# Altium PCB PCB1.PcbDoc
Units mm, origin at the board's own origin, x right, y up, seen from the top; angles counter-clockwise.
Board outline 104.9 x 105.16 mm, 2 copper layers (Top Layer, Bottom Layer); 47 components, 33 nets, 170 pads, 33 vias.
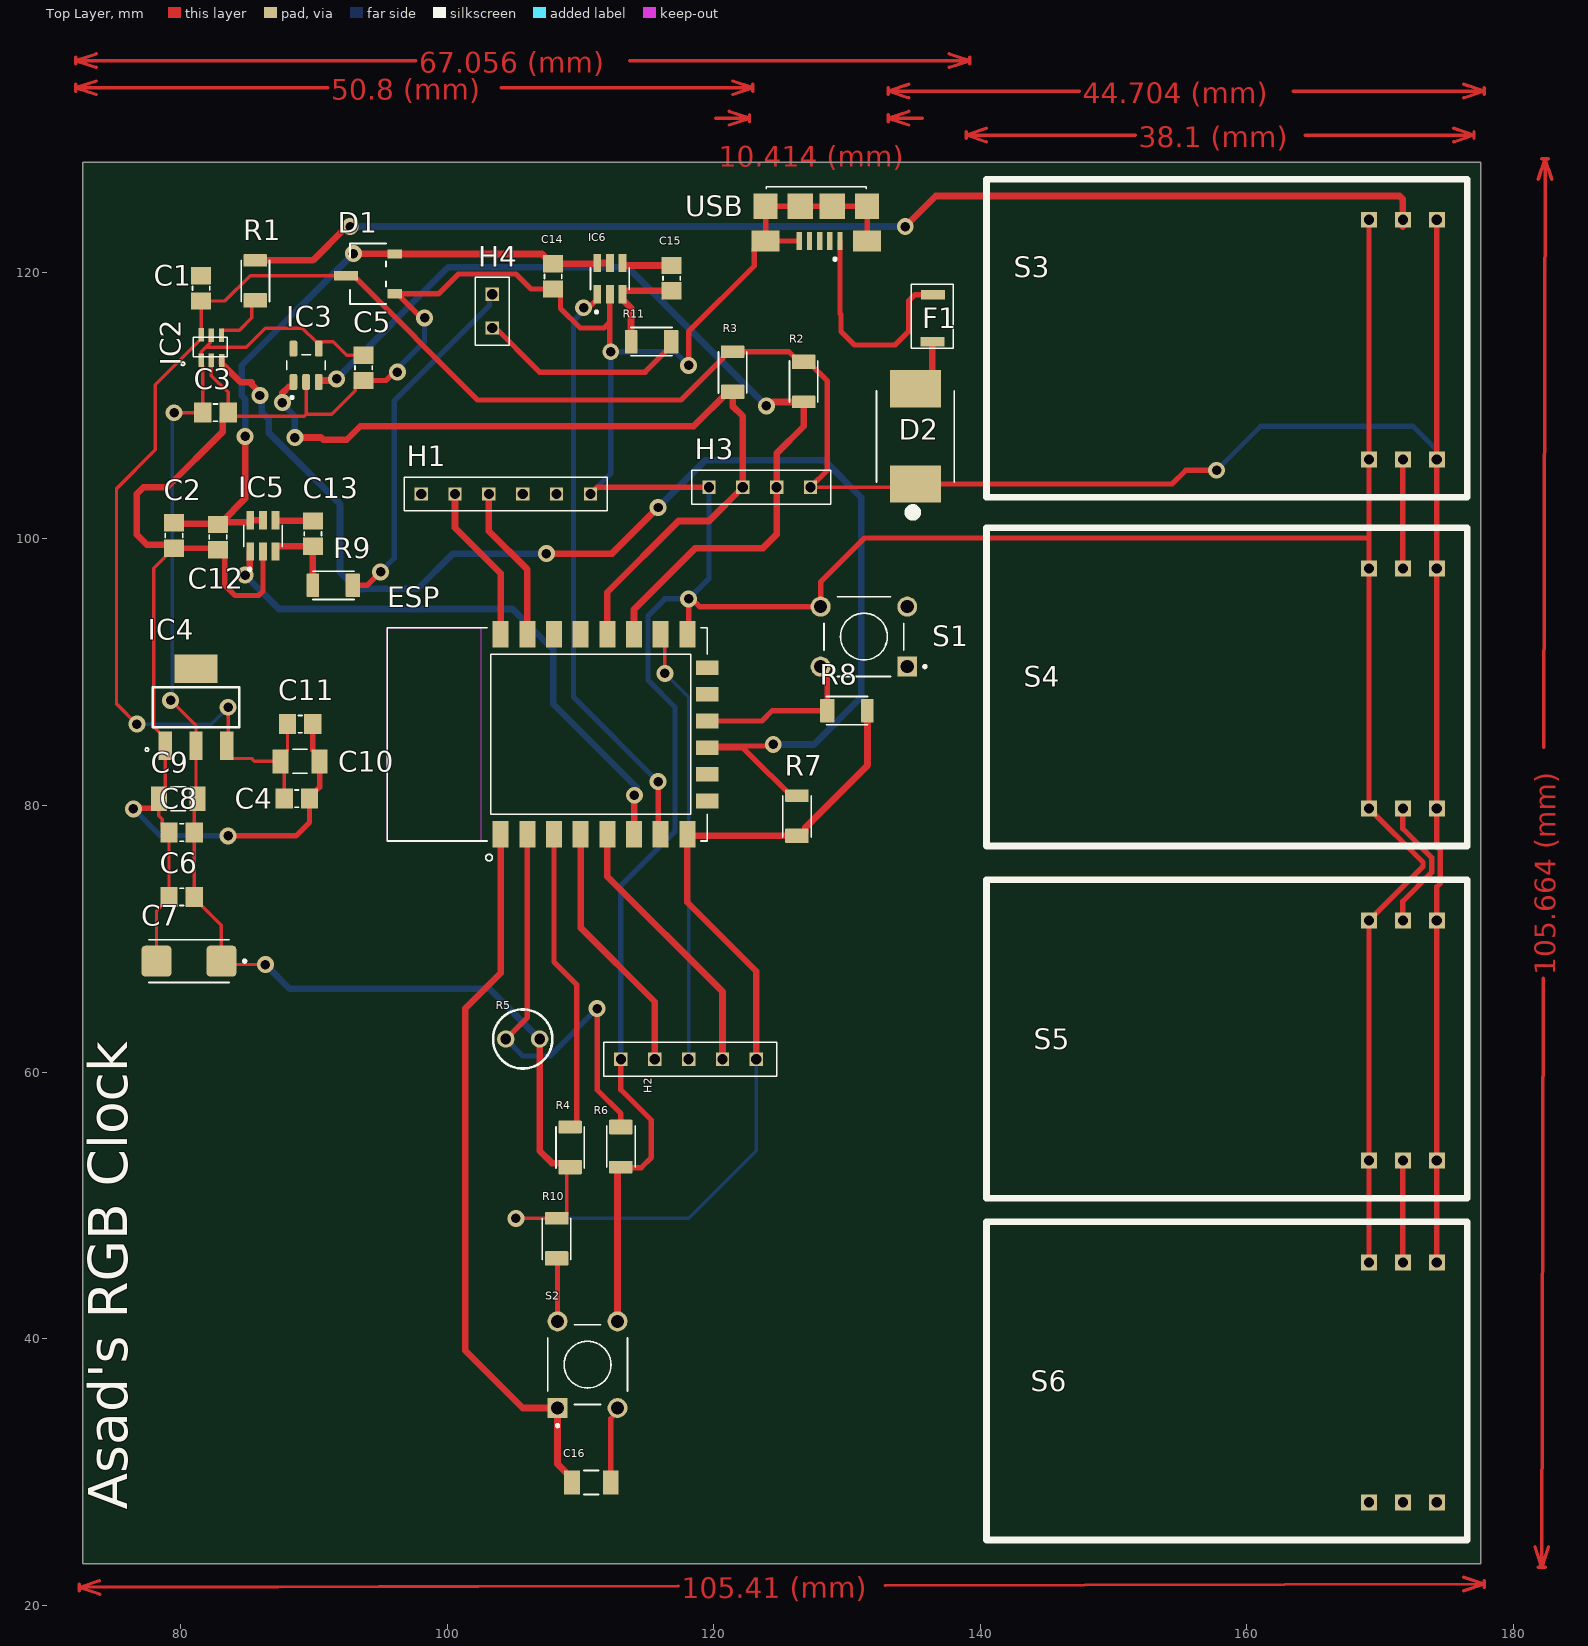
[diagram p0: Top Layer view]
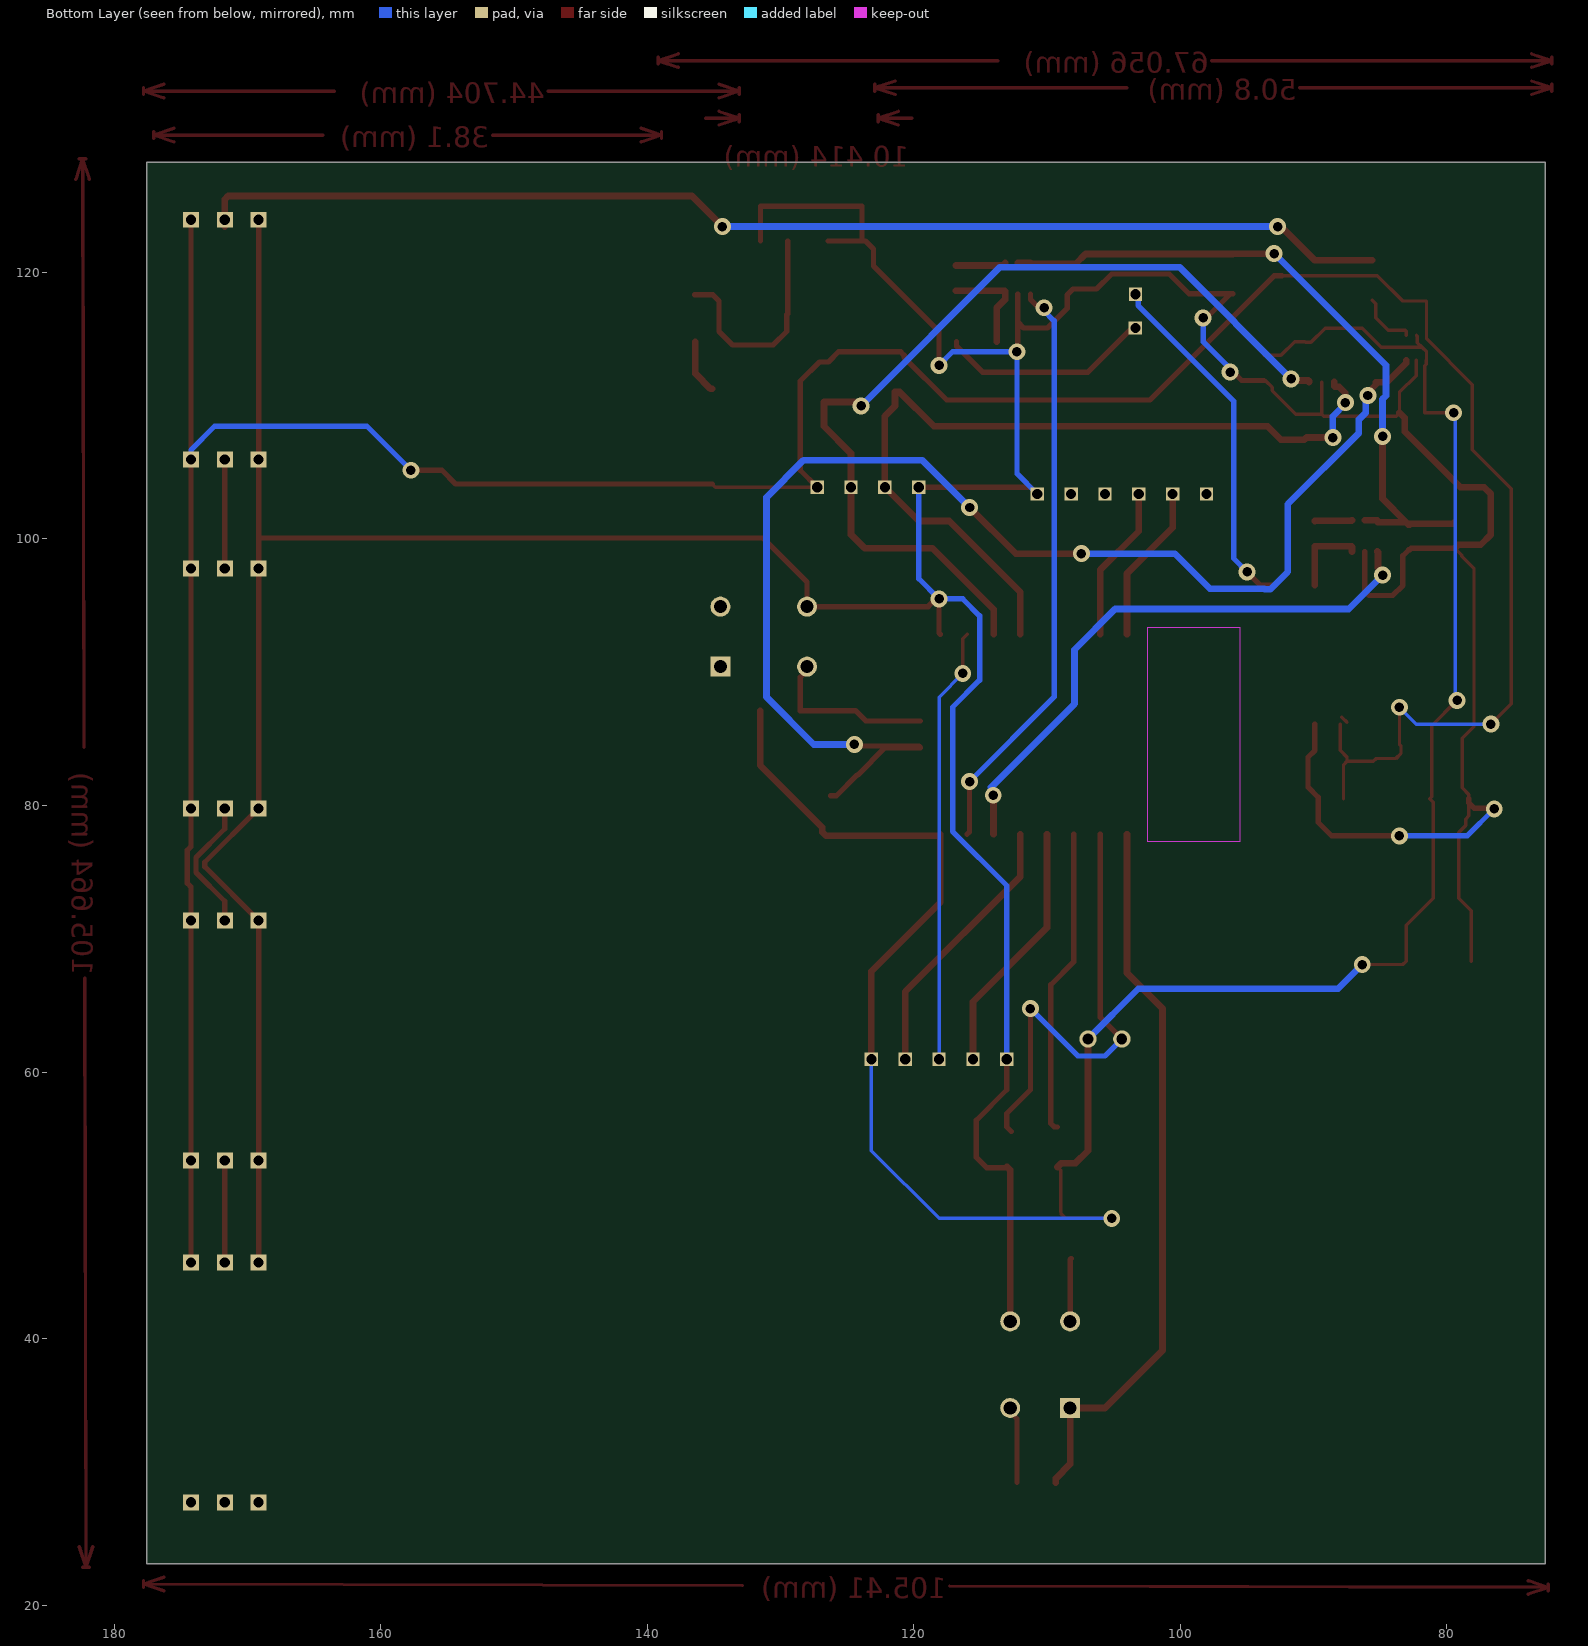
[diagram p1: Bottom Layer view, seen from below]

## Layer stack, top to bottom
Top Solder: solder mask 0.0102, Solder Resist, Dk 3.5
Top Layer: signal copper 0.0356
Dielectric 1: dielectric 0.32, FR-4, Dk 4.8
Bottom Layer: signal copper 0.0356
Bottom Solder: solder mask 0.0102, Solder Resist, Dk 3.5

## Board outline
72.644,23.114 72.644,128.27 177.546,128.27 177.546,23.114

## Design rules (kind name [scope] priority, off if disabled: settings)
Clearance [All] p1: gap=0.254 ignorepadtopadclearanceinfootprint=FALSE except(0: Arc-Hole Track-Hole SMDPad-Hole THPad-Hole Via-Hole Fill-Hole Poly-Hole Region-Hole Text-Hole)
PolygonConnect [All] p1: connectstyle=Relief reliefconductorwidth=0.254 reliefentries=4 polygonreliefangle="90 Angle" airgapwidth=0.254
RoutingVias [All] p1: holewidth=0.711 width=1.27 viastyle="Through Hole" minholewidth=0.711 minwidth=1.27 maxholewidth=0.711 maxwidth=1.27
SolderMaskExpansion [All] p1: expansion=0.102 istentingtop=FALSE
Width [All] p1: maxlimit=0.5 minlimit=0.254 preferedwidth=0.254 minimp=50.000000 maximp=50.000000 favimp=50.000000
30 further rules are at their usual default settings.

## Components (designator, comment, footprint, x,y, rotation, side; value= is the part's Value field where it differs from the comment)
C1 "100nF" "CAP 0805" 81.534,118.806 r90 top
C2 "1uF" "CAP 0603" 79.502,100.264 r270 top
C3 "100nF" "CAP 0805" 82.616,109.474 r180 top
C4 "1uF" "CAP 0603" 88.712,80.518 r0 top
C5 "100nF" "CAP 0805" 93.726,112.842 r270 top
C6 "100nF" "CAP 0805" 80.076,73.152 r180 top
C7 "100uF" "CAP 2312" 80.623,68.326 r180 top
C8 "100nF" "CAP 0805" 80.076,77.978 r0 top
C9 "10uF" "CAP 1206" 79.82,80.518 r180 top
C10 "10uF" "CAP 1206" 88.964,83.312 r0 top
C11 "100nF" "CAP 0805" 88.966,86.106 r180 top
C12 "100nF" "CAP 0805" 82.804,100.142 r270 top
C13 "10nF" "CAP 0805" 89.916,100.396 r270 top
C14 "100nF" "CAP 0805" 107.95,119.7 r270 top
C15 "10nF" "CAP 0805" 116.84,119.568 r270 top
C16 "10uF" "CAP 1206" 110.808,29.21 r0 top
D1 "MCP1700T-3302E/TT" MCP1700 94.234,119.888 r90 top
D2 "MBRS540T3G" MBRS50 135.128,107.696 r90 top
ESP "ESP8266" ESP8266 111.76,85.344 r90 top
F1 "MF-SMDF200-2" MF-SMDF200-2 165.579,496.583 r90 top
H1 "6 PIN H" "6 PIN H" 104.394,103.379 r270 top
H2 "5 PIN H" "5 PIN H" 118.11,60.959 r90 top
H3 "4 PIN H" "4 PIN H" 123.444,103.885 r90 top
H4 "2 PIN H" "2 PIN H" 103.887,109.22 r0 top
IC2 "74LVC1T45GW,125" 74LVC1T45GW,125 83.847,116.322 r90 top
IC3 "24LC64T-I/OT" 24LC64T-I/OT 89.408,113.03 r90 top
IC4 "LD1117S33TR" LD1117S33TR 82.296,88.138 r90 top
IC5 "AT42QT1010-TSHR" AT42QT1010-TSHR 86.172,100.23 r90 top
IC6 "AT42QT1010-TSHR" AT42QT1010-TSHR 112.202,119.534 r90 top
R1 "RES 1K" "RES 1206" 85.598,119.401 r90 top
R2 "10K" "RES 1206" 126.746,111.782 r270 top
R3 "10K" "RES 1206" 121.412,112.543 r90 top
R4 "10K" "RES 1206" 109.22,54.377 r90 top
R5 "NSL 19M51." NSL-19M51 105.664,62.484 r90 top
R6 "10K" "RES 1206" 113.03,54.378 r270 top
R7 "10K" "RES 1206" 126.238,79.226 r90 top
R8 "10K" "RES 1206" 130.026,87.122 r0 top
R9 "10K" "RES 1206" 91.419,96.52 r180 top
R10 "10K" "RES 1206" 108.204,47.519 r90 top
R11 "10K" "RES 1206" 115.295,114.808 r180 top
S1 "PUSH BUTTON" "PUSH BUTTON" 131.266,92.674 r180 top
S2 "PUSH BUTTON" "PUSH BUTTON" 110.526,38.048 r90 top
S3 "7 SEGMENT" "7 SEGMENT" 174.244,123.952 r270 top
S4 "7 SEGMENT" "7 SEGMENT" 174.244,97.79 r270 top
S5 "7 SEGMENT" "7 SEGMENT" 174.244,71.374 r270 top
S6 "7 SEGMENT" "7 SEGMENT" 174.244,45.72 r270 top
USB "10118192-0002LF" 10118192-0002LF 127.692,123.63 r180 top

## Footprints (in the part's own frame and the unit in brackets; to place one, negate y for a bottom-side part, rotate by r counter-clockwise, add the part's x,y. Pads: shape width x height; smd on the part's side, far side on the other; paste and mask are expansions set on the pad)
"2 PIN H" [mil]
  rect 39.37x39.37 hole 30: 1(-20.06,360) 2(-20,260)
  silkscreen extent -70,210 30,410
"4 PIN H" [mm]
  rect 1x1 hole 0.762: 1(-0.001,3.81) 2(0.001,1.27) 3(0.001,-1.27) 4(0.001,-3.81)
  silkscreen extent -1.27,-5.33 1.27,5.08
"5 PIN H" [mm]
  rect 1x1 hole 0.762: 1(-0.001,5.08) 2(0.001,2.54) 3(0.001,0) 4(0.001,-2.54) 5(0.001,-5.08)
  silkscreen extent -1.27,-6.6 1.27,6.35
"6 PIN H" [mm]
  rect 1x1 hole 0.762: 1(-0.001,6.35) 2(0.001,3.81) 3(0.001,1.27) 4(0.001,-1.27) 5(0.001,-3.81) 6(0.001,-6.35)
  silkscreen extent -1.27,-7.62 1.27,7.62
"7 SEGMENT" [mm]
  rect 1.2x1.2 hole 0.762: 1(0,0) 2(0,-2.54) 3(0,-5.08) 4(18,0) 5(18,-2.54) 6(18,-5.08)
  silkscreen extent -3.05,-33.78 20.83,2.29
24LC64T-I/OT [mm]
  rrect50% 1.21x0.59 smd: 1(-1.255,0.95) 2(-1.255,0) 3(-1.255,-0.95) 4(1.255,-0.95) 5(1.255,0.95)
  silkscreen extent -2.51,-1.45 0.8,1.45
74LVC1T45GW,125 [mm]
  rect 1x0.4 smd: 1(-2.9,2.3) 2(-2.922,1.542) 3(-2.934,0.777) 4(-1.041,0.79) 5(-1.028,1.555) 6(-1.006,2.313)
  silkscreen extent -3.3,0.34 -1.18,3.81
10118192-0002LF [mm]
  rect 0.4x1.35 smd: 1(-1.778,1.27) 2(-1.016,1.27) 3(-0.254,1.27) 4(0.508,1.27) 5(1.27,1.27)
  rect 2.1x1.6 smd: S1(-3.81,1.27) S2(3.81,1.27)
  rect 1.8x1.9 smd: S3(-3.8,-1.338) S6(3.8,-1.338)
  rect 1.9x1.9 smd: S4(-1.2,-1.338) S5(1.2,-1.338)
  silkscreen extent -3.75,-2.79 3.75,2.74
AT42QT1010-TSHR [mm]
  rect 1.37x0.59 smd: 1(-1.17,0.95) 2(-1.17,0) 3(-1.17,-0.95) 4(1.17,-0.95) 5(1.17,0) 6(1.17,0.95)
  silkscreen extent -2.6,-1.45 0.81,1.45
"CAP 0603" [mm]
  rect 1.3x1.5 smd: 1(-0.95,0) 2(0.95,0)
  silkscreen extent -0.15,-0.65 0.15,0.65
"CAP 0805" [mm]
  rect 1.3x1.5 smd: 1(-0.95,0) 2(0.95,0)
  silkscreen extent -0.15,-0.65 0.15,0.65
"CAP 1206" [mm]
  rect 1.2x1.82 smd: 1(-1.46,0) 2(1.46,0)
  silkscreen extent -0.54,-0.9 0.54,0.9
"CAP 2312" [mm]
  rrect25% 2.24x2.32 smd: 1(-2.435,0) 2(2.435,0)
  silkscreen extent -4.28,-1.6 3,1.6
ESP8266 [mm]
  rect 2x1.2 smd: 1(-7.5,7.75) 2(-7.5,5.75) 3(-7.5,3.75) 4(-7.5,1.75) 5(-7.5,-0.25) 6(-7.5,-2.25) 7(-7.5,-4.25) 8(-7.5,-6.25) 15(7.5,-6.25) 16(7.5,-4.25) 17(7.5,-2.25) 18(7.5,-0.25) 19(7.5,1.75) 20(7.5,3.75) 21(7.5,5.75) 22(7.5,7.75)
  rect 1.1x1.7 smd: 9(-5,-7.75) 10(-3,-7.75) 11(-1,-7.75) 12(1,-7.75) 13(3,-7.75) 14(5,-7.75)
  Keep-Out Layer region: 8,9.26 -8.009,9.26 -8.009,16.25 8,16.25
  Keep-Out Layer region: 8,9.26 -8.009,9.26 -8.009,16.25 8,16.25
  silkscreen extent -9.5,-7.75 8,16.25
LD1117S33TR [mm]
  rect 2.15x1 smd: 1(-3.662,3.443) 2(-3.662,1.143) 3(-3.662,-1.157)
  rect 2.15x3.25 smd: 4(2.138,1.143)
  silkscreen extent -4.06,-2.11 0.74,4.95
MBRS50 [mil]
  rect 110x150 smd: A(140.49,0) C(-140.49,0)
  silkscreen extent -237,-115 135,115
MCP1700 [mm]
  rect 0.7x1.1 smd: 1(-1.5,-1.827) 2(1.5,-1.827)
  rect 0.7x1.8 smd paste-2 mask+0: 3(-0.127,1.827)
  silkscreen extent -2.27,-1.19 2.27,1.53
MF-SMDF200-2 [mm]
  rect 0.7x1.8 smd paste-2 mask+0: 1(-381.775,29.181) 2(-378.246,29.14)
  silkscreen extent -382.28,27.6 -377.48,30.75
NSL-19M51 [mm]
  round 1.308 hole 0.8: 1(0,1.27) 2(0,-1.27)
  silkscreen extent -2.22,-2.22 2.22,2.22
"PUSH BUTTON" [mm]
  rect 1.498x1.498 hole 0.99: 1(-3.25,2.25)
  round 1.498 hole 0.99: 2(3.25,2.25) 3(-3.25,-2.25) 4(3.25,-2.25)
  silkscreen extent -4.67,-3 3,3
"RES 1206" [mm]
  rrect14% 1.09x1.77 smd: 1(-1.502,0)
  rrect14% 0.94x1.77 smd: 2(1.503,0)
  silkscreen extent -1.59,-1.06 1.51,1.06

## Part data
C1 C3 C5 C6 C8 C11 C12 C14: library part "CAP 100nF"
C2 C4: library part "CAP 1 uF 50V", "SAMSUNG ELECTRO-MECHANICS - CL21B105KBFNNNG - MLCC CAPACITORS", Case Code (Imperial)=0805, Case Code (Metric)=2012, Dielectric=X7R, Manufacturer=Samsung, Manufacturer Part Number=CL21B105KBFNNNG, Max Operating Temperature=125°C, Min Operating Temperature=-55°C, Package Quantity=3000, Supplier Part Number 1=1276-6470-1-ND, Tolerance=10%, Voltage=50V, Capacitance=1uF, Case/Package=0805, Category="Ceramic Capacitors", ComponentLink1Description=https://datasheet.ciiva.com/25733/cl21b105kbfnnng-25733278.pdf?src-supplier=Digi-Key, ComponentLink1URL=https://datasheet.ciiva.com/25733/cl21b105kbfnnng-25733278.pdf?src-supplier=Digi-Key, ComponentLink2Description=https://datasheet.ciiva.com/29199/455898-da-01-en-vs-kondensator-0805-29199201.pdf?src-supplier=Conrad, ComponentLink2URL=https://datasheet.ciiva.com/29199/455898-da-01-en-vs-kondensator-0805-29199201.pdf?src-supplier=Conrad, ComponentLink3Description=https://datasheet.ciiva.com/26310/mlcc-catalogdownload2013-eng-26310125.pdf?src-supplier=Distrelec, ComponentLink3URL=https://datasheet.ciiva.com/26310/mlcc-catalogdownload2013-eng-26310125.pdf?src-supplier=Distrelec, ComponentLink4Description=https://datasheet.ciiva.com/16428/cl05b104kq5nnnc-16428872.pdf?src-supplier=Future+Electronics, ComponentLink4URL=https://datasheet.ciiva.com/16428/cl05b104kq5nnnc-16428872.pdf?src-supplier=Future+Electronics, Construction=Flat, Contact Plating=Tin, Depth=1.25mm, Length=2mm, Material=Ceramic, Mount="Surface Mount", Packaging="Tape and Reel", Pricing 1="1=0.12000, 10=0.08900, 50=0.05020, 100=0.04160, 500=0.02918, 1000=0.02416 (USD)", RoHS=Yes, RoHS Compliant=Yes, Series=CL, Stock 1=1584886, Supplier 1=Digi-Key, Termination=Wraparound, Thickness=0.053inch, Voltage Rating=50V, Width=0.049inch
C7: library part "CAP 100uF 16V", "Cap Tant Solid 100uf 16V C Case (6.0x3.2x2.5mm) 10% SMD 200 mOhm 125C T/R", Case Code (Imperial)=2413, Case Code (Metric)=6032, ESR (Equivalent Series Resistance)=200mR, Manufacturer=KEMET, Manufacturer Part Number=T495C107K016ATE200, Max Operating Temperature=125°C, Min Operating Temperature=-55°C, Package Quantity=1, Supplier Part Number 1=399-11392-1-ND, Tolerance=10%, Voltage Rating=16V, Capacitance=100uF, Case/Package=2413, Category="Tantalum Capacitors", ComponentLink1Description=http://www.farnell.com/datasheets/2373561.pdf?src-supplier=Farnell, ComponentLink1URL=http://www.farnell.com/datasheets/2373561.pdf?src-supplier=Farnell, ComponentLink2Description=http://www.farnell.com/datasheets/2758439.pdf?src-supplier=Newark, ComponentLink2URL=http://www.farnell.com/datasheets/2758439.pdf?src-supplier=Newark, ComponentLink3Description=http://www.farnell.com/datasheets/2015701.pdf?src-supplier=Element14, ComponentLink3URL=http://www.farnell.com/datasheets/2015701.pdf?src-supplier=Element14, ComponentLink4Description=http://www.farnell.com/datasheets/2373561.pdf?src-supplier=Newark, ComponentLink4URL=http://www.farnell.com/datasheets/2373561.pdf?src-supplier=Newark, ComponentLink5Description=https://api.kemet.com/component-edge/download/datasheet/T495C107K016ATE200.pdf?src-supplier=Digi-Key, ComponentLink5URL=https://api.kemet.com/component-edge/download/datasheet/T495C107K016ATE200.pdf?src-supplier=Digi-Key, ComponentLink6Description=http://capacitoredge.kemet.com/capedge2/DataSheet/Datasheet-T495C107K016ATE200.pdf?pn=T495C107K016ATE200&src-supplier=Avnet, ComponentLink6URL=http://capacitoredge.kemet.com/capedge2/DataSheet/Datasheet-T495C107K016ATE200.pdf?pn=T495C107K016ATE200&src-supplier=Avnet, Depth=3.2mm, Features="General Purpose", Height=2.5mm, Height - Seated (Max)=0.11inch, Lead Free="Lead Free", Length=0.236inch, Life (Hours)=2000Hour, Mount="Surface Mount", Packaging="Cut Tape", Pricing 1="1=1.73000, 10=1.36900, 50=1.18600, 100=1.02640 (USD)", Radiation Hardening=No, REACH SVHC=Unknown, RoHS=Yes, RoHS Compliant=Yes, Stock 1=4587, Supplier 1=Digi-Key, Voltage Rating (DC)=16V, Width=0.126inch
C9 C10 C16: library part "CAP 10uF 10V", "Cap Ceramic 10uF 10V X5R 10% SMD 1206 85C T/R", Case Code (Imperial)=1206, Case Code (Metric)=3216, Dielectric=X5R, Manufacturer=Samsung, Manufacturer Part Number=CL31A106KPHNNNE, Max Operating Temperature=85°C, Min Operating Temperature=-55°C, Supplier Part Number 1=1276-1148-1-ND, Tolerance=10%, Voltage Rating=10V, Capacitance=10uF, Case/Package=1206, Category="Ceramic Capacitors", ComponentLink1Description=https://datasheet.ciiva.com/15195/getdatasheetpartid-357468-15195994.pdf?src-supplier=Verical, ComponentLink1URL=https://datasheet.ciiva.com/15195/getdatasheetpartid-357468-15195994.pdf?src-supplier=Verical, ComponentLink2Description=https://datasheet.ciiva.com/16224/cl31a106kphnnne-16224988.pdf?src-supplier=Future+Electronics, ComponentLink2URL=https://datasheet.ciiva.com/16224/cl31a106kphnnne-16224988.pdf?src-supplier=Future+Electronics, Construction=Flat, Contact Plating=Tin, Depth=1.6mm, Height=1.6mm, Length=3.2mm, Mount="Surface Mount", Packaging="Tape and Reel", Pricing 1="1=0.23000, 10=0.15900, 50=0.09540, 100=0.08060, 500=0.05516, 1000=0.04880 (USD)", Radiation Hardening=No, RoHS=Yes, RoHS Compliant=Yes, Series=CL, Stock 1=176788, Supplier 1=Digi-Key, Thickness=0.071inch, Width=0.063inch
C13 C15: library part "CAP 10nF 50V", "SAMSUNG ELECTRO-MECHANICS - CL21B103KBANNNC - SMD Vícevrstvý Keramický Kondenzátor, 10000 pF, 50 V, 0805 [2012 Metrické], ± 10%, X7R, CL Series", Case Code (Imperial)=0805, Case Code (Metric)=2012, Dielectric=X7R, Manufacturer=Samsung, Manufacturer Part Number=CL21B103KBANNNC, Max Operating Temperature=125°C, Min Operating Temperature=-55°C, Supplier Part Number 1=1276-1015-1-ND, Tolerance=10%, Voltage=50V, Capacitance=10nF, Case/Package=0805, Category="Ceramic Capacitors", ComponentLink1Description=https://datasheet.ciiva.com/25709/cl21b103kbannnc-25709781.pdf?src-supplier=Digi-Key, ComponentLink1URL=https://datasheet.ciiva.com/25709/cl21b103kbannnc-25709781.pdf?src-supplier=Digi-Key, ComponentLink2Description=https://datasheet.ciiva.com/29199/455082-da-01-en-vs-kondensator-0805-29199459.pdf?src-supplier=Conrad, ComponentLink2URL=https://datasheet.ciiva.com/29199/455082-da-01-en-vs-kondensator-0805-29199459.pdf?src-supplier=Conrad, Construction=Flat, Contact Plating=Tin, Depth=1.25mm, Height=0.65mm, Lead Free="Lead Free", Length=2mm, Material=Ceramic, Mount="Surface Mount", Packaging="Tape and Reel", Pricing 1="1=0.10000, 10=0.04700, 50=0.02560, 100=0.02100, 500=0.01498, 1000=0.01176 (USD)", Radiation Hardening=No, RoHS=Yes, RoHS Compliant=Yes, Series=CL, Stock 1=930321, Supplier 1=Digi-Key, Thickness=0.03inch, Voltage Rating=50V, Voltage Rating (DC)=50V, Width=0.049inch
D1: "Pwr Sply Func; Voltage Regulator; LDO; SOT-23; PD 369.6mW; VO 3.3V; Regline +/-0.75%/V", Case/Package=SOT-23, Dropout Voltage=178mV, Input Bias Current=1.6uA, Manufacturer=Microchip, Max Input Voltage=6V, Max Operating Temperature=125°C, Max Output Current=250mA, Max Output Voltage=3.3V, Max Power Dissipation=369.6mW, Min Input Voltage=2.3V, Min Operating Temperature=-40°C, Nominal Supply Current=4uA, Output Voltage Accuracy=2%, Package Quantity=3000, Supplier Part Number 1=6989044P, Accuracy=2%, Category="Voltage Regulators - Linear", ComponentLink1Description=https://datasheet.ciiva.com/2040/21826b-2040112.pdf?src-supplier=Digi-Key, ComponentLink1URL=https://datasheet.ciiva.com/2040/21826b-2040112.pdf?src-supplier=Digi-Key, ComponentLink2Description=https://datasheet.ciiva.com/5801/1784514-5801824.pdf?src-supplier=Farnell, ComponentLink2URL=https://datasheet.ciiva.com/5801/1784514-5801824.pdf?src-supplier=Farnell, ComponentLink3Description=https://datasheet.ciiva.com/2040/21826b-2040113.pdf?src-supplier=Digi-Key, ComponentLink3URL=https://datasheet.ciiva.com/2040/21826b-2040113.pdf?src-supplier=Digi-Key, ComponentLink4Description=https://datasheet.ciiva.com/2040/21826b-2040114.pdf?src-supplier=Digi-Key, ComponentLink4URL=https://datasheet.ciiva.com/2040/21826b-2040114.pdf?src-supplier=Digi-Key, ComponentLink5Description=https://datasheet.ciiva.com/3224/jp011779-3224133.pdf?src-supplier=Avnet, ComponentLink5URL=https://datasheet.ciiva.com/3224/jp011779-3224133.pdf?src-supplier=Avnet, ComponentLink6Description=https://datasheet.ciiva.com/7649/1784514-7649813.pdf?src-supplier=Element14, ComponentLink6URL=https://datasheet.ciiva.com/7649/1784514-7649813.pdf?src-supplier=Element14, ComponentLink7Description=https://datasheet.ciiva.com/15200/getdatasheetpartid-453599-15200229.pdf?src-supplier=Verical, ComponentLink7URL=https://datasheet.ciiva.com/15200/getdatasheetpartid-453599-15200229.pdf?src-supplier=Verical, ComponentLink8Description=https://datasheet.ciiva.com/17364/jp011779-17364263.pdf?src-supplier=Avnet+Europe, ComponentLink8URL=https://datasheet.ciiva.com/17364/jp011779-17364263.pdf?src-supplier=Avnet+Europe, ComponentLink9Description=https://datasheet.ciiva.com/14150/mcp1700-eng-tds-14150122.pdf?src-supplier=Distrelec, ComponentLink9URL=https://datasheet.ciiva.com/14150/mcp1700-eng-tds-14150122.pdf?src-supplier=Distrelec, ComponentLink10Description=https://datasheet.ciiva.com/22710/1784514-22710988.pdf?src-supplier=Element14, ComponentLink10URL=https://datasheet.ciiva.com/22710/1784514-22710988.pdf?src-supplier=Element14, ComponentLink11Description=https://datasheet.ciiva.com/29305/651414-da-01-en-ic-reg-ld-mcp1700t-3302e-tt-sot-23-3-mcp-29305258.pdf?src-supplier=Conrad, ComponentLink11URL=https://datasheet.ciiva.com/29305/651414-da-01-en-ic-reg-ld-mcp1700t-3302e-tt-sot-23-3-mcp-29305258.pdf?src-supplier=Conrad, Contact Plating=Tin,Matte, Height=0.95mm, Lead Free="Lead Free", Length=2.9mm, Manufacturer Part Number=MCP1700T-3302E/TT, Max Supply Voltage=6V, Min Output Voltage=3.3V, Min Supply Voltage=2.3V, Mount="Surface Mount", Nominal Output Voltage=3.3V, Number of Outputs=1, Number of Pins=3, Output Current=250mA, Output Type=Fixed, Output Voltage=3.3V, Packaging="Tape and Reel", Polarity=Positive, Power Dissipation=369.6mW, Pricing 1="1=0.40600 (USD)", Quiescent Current=4uA, Radiation Hardening=No, REACH SVHC="No SVHC", RoHS=Yes, Stock 1=1170, Supplier 1=RSComponents, Termination=SMD/SMT, Width=1.3mm
D2: "ON SEMICONDUCTOR - MBRS540T3G - Schottky Rectifier, 40 V, 5 A, Single, DO-214AB (SMC), 2 Pins, 500 mV", Average Rectified Current=5A, Case/Package=SMC, Forward Voltage=500mV, Manufacturer="ON Semiconductor", Max Forward Surge Current (Ifsm)=190A, Max Operating Temperature=150°C, Max Repetitive Reverse Voltage (Vrrm)=40V, Max Reverse Current=300uA, Min Operating Temperature=-65°C, Package Quantity=2500, Supplier Part Number 1=94T5861, Category="Rectifier Diodes", ComponentLink1Description=https://datasheet.ciiva.com/916/mbrs540t3-d-916082.pdf?src-supplier=Digi-Key, ComponentLink1URL=https://datasheet.ciiva.com/916/mbrs540t3-d-916082.pdf?src-supplier=Digi-Key, ComponentLink2Description=https://datasheet.ciiva.com/16225/mbrs540t3-d-16225604.pdf?src-supplier=Future+Electronics, ComponentLink2URL=https://datasheet.ciiva.com/16225/mbrs540t3-d-16225604.pdf?src-supplier=Future+Electronics, ComponentLink3Description=https://datasheet.ciiva.com/22659/1708285-22659081.pdf?src-supplier=Element14, ComponentLink3URL=https://datasheet.ciiva.com/22659/1708285-22659081.pdf?src-supplier=Element14, ComponentLink4Description=https://datasheet.ciiva.com/916/mbrs540t3-d-916083.pdf?src-supplier=Digi-Key, ComponentLink4URL=https://datasheet.ciiva.com/916/mbrs540t3-d-916083.pdf?src-supplier=Digi-Key, ComponentLink5Description=https://datasheet.ciiva.com/916/mbrs540t3-d-916084.pdf?src-supplier=Digi-Key, ComponentLink5URL=https://datasheet.ciiva.com/916/mbrs540t3-d-916084.pdf?src-supplier=Digi-Key, ComponentLink6Description=https://datasheet.ciiva.com/5763/mbrs540t3-d-5763253.pdf?src-supplier=Farnell, ComponentLink6URL=https://datasheet.ciiva.com/5763/mbrs540t3-d-5763253.pdf?src-supplier=Farnell, ComponentLink7Description=https://datasheet.ciiva.com/29883/mbrs540t3-d-29883735.pdf?src-supplier=Avnet, ComponentLink7URL=https://datasheet.ciiva.com/29883/mbrs540t3-d-29883735.pdf?src-supplier=Avnet, ComponentLink8Description=https://datasheet.ciiva.com/8299/mbrs540t3-d-8299865.pdf?src-supplier=Avnet, ComponentLink8URL=https://datasheet.ciiva.com/8299/mbrs540t3-d-8299865.pdf?src-supplier=Avnet, ComponentLink9Description=https://datasheet.ciiva.com/25948/mbrs540t3-d-25948171.pdf?src-supplier=Avnet+Europe, ComponentLink9URL=https://datasheet.ciiva.com/25948/mbrs540t3-d-25948171.pdf?src-supplier=Avnet+Europe, ComponentLink10Description=https://datasheet.ciiva.com/15144/getdatasheetpartid-40347-15144093.pdf?src-supplier=Verical, ComponentLink10URL=https://datasheet.ciiva.com/15144/getdatasheetpartid-40347-15144093.pdf?src-supplier=Verical, Contact Plating=Tin,Matte, Current Rating=5A, Element Configuration=Single, Forward Current=5A, Halogen Free="Halogen Free", Height=0.095inch, Lead Free="Lead Free", Length=0.279inch, Manufacturer Part Number=MBRS540T3G, Max Reverse Leakage Current=300uA, Max Reverse Voltage (DC)=40V, Max Surge Current=190A, Number of Pins=2, Output Current=5A, Packaging="Tape and Reel", Peak Non-Repetitive Surge Current=190A, Polarity=Standard, Pricing 1="5=0.51800, 10=0.44800, 100=0.31900, 500=0.25500 (USD)", Radiation Hardening=No, REACH SVHC="No SVHC", RoHS=Yes, RoHS Compliant=Yes, Series=-, Stock 1=89, Supplier 1=Newark, Voltage Rating (DC)=40V, Width=0.24inch
F1: "BOURNS         MF-SMDF200-2             FUSE, RESETTABLE PTC, 10V, 2A, SMD", Case Code (Imperial)=2018, Case Code (Metric)=5045, Current Rating=40A, Hold Current=2A, Manufacturer=Bourns, Max Operating Temperature=85°C, Min Operating Temperature=-40°C, Operating Supply Voltage=10V, Package Quantity=6000, Power Dissipation=1.1W, Resistance=100mR, Supplier Part Number 1=MF-SMDF200-2CT-ND, Trip Current=4A, Approvals=UL,CSA,TUV, Case/Package=2018, Category="PTC Resettable Fuses", ComponentLink1Description=https://datasheet.ciiva.com/327/mfsmdf2-327988.pdf?src-supplier=Digi-Key, ComponentLink1URL=https://datasheet.ciiva.com/327/mfsmdf2-327988.pdf?src-supplier=Digi-Key, ComponentLink2Description=https://datasheet.ciiva.com/3020/mfsmdf2-3020610.pdf?src-supplier=Avnet, ComponentLink2URL=https://datasheet.ciiva.com/3020/mfsmdf2-3020610.pdf?src-supplier=Avnet, ComponentLink3Description=https://datasheet.ciiva.com/327/mfsmdf2-327989.pdf?src-supplier=Digi-Key, ComponentLink3URL=https://datasheet.ciiva.com/327/mfsmdf2-327989.pdf?src-supplier=Digi-Key, ComponentLink4Description=https://datasheet.ciiva.com/327/mfsmdf2-327990.pdf?src-supplier=Digi-Key, ComponentLink4URL=https://datasheet.ciiva.com/327/mfsmdf2-327990.pdf?src-supplier=Digi-Key, ComponentLink5Description=https://datasheet.ciiva.com/32438/mf-smdf-series-eng-tds-32438743.pdf?src-supplier=Distrelec, ComponentLink5URL=https://datasheet.ciiva.com/32438/mf-smdf-series-eng-tds-32438743.pdf?src-supplier=Distrelec, ComponentLink6Description=https://datasheet.ciiva.com/17414/mfsmdf2-17414504.pdf?src-supplier=Avnet+Europe, ComponentLink6URL=https://datasheet.ciiva.com/17414/mfsmdf2-17414504.pdf?src-supplier=Avnet+Europe, Manufacturer Part Number=MF-SMDF200-2, Max Current Rating=40A, Packaging="Tape and Reel", Pricing 1="1=0.67000, 5=0.65000, 10=0.63000, 50=0.53000, 100=0.44000, 250=0.40000, 500=0.34000, 1000=0.30000 (USD)", Radiation Hardening=No, REACH SVHC="No SVHC", RoHS=Yes, RoHS Compliant=Yes, Series=MF-SMDF, Stock 1=4493, Supplier 1=Digi-Key, Termination=SMD/SMT, Time to Trip=2.7s, Voltage Rating=10V, Voltage Rating (DC)=10V
IC2: "74LVC1T45; 74LVCH1T45 - Dual supply translating transceiver; 3-state", Manufacturer=Nexperia, Supplier Part Number 1=55W4712, Category="Voltage Level Shifters", ComponentLink1Description=http://www.farnell.com/datasheets/1645592.pdf?src-supplier=Farnell, ComponentLink1URL=http://www.farnell.com/datasheets/1645592.pdf?src-supplier=Farnell, ComponentLink2Description=https://assets.nexperia.com/documents/data-sheet/74LVC_LVCH1T45.pdf?src-supplier=Digi-Key, ComponentLink2URL=https://assets.nexperia.com/documents/data-sheet/74LVC_LVCH1T45.pdf?src-supplier=Digi-Key, Manufacturer Part Number=74LVC1T45GW,125, Pricing 1="5=0.50000, 10=0.40500, 25=0.37000, 50=0.32300, 100=0.27500, 250=0.25000 (USD)", RoHS=Yes, RoHS Compliant=Yes, Stock 1=9, Supplier 1=Newark
IC3: "EEPROM Serial-I2C 64K-bit 8K x 8 3.3V/5V 5-Pin SOT-23 T/R", Case/Package=SOT-23, Frequency=400kHz, Manufacturer=Microchip, Max Operating Temperature=85°C, Max Supply Voltage=5.5V, Min Operating Temperature=-40°C, Min Supply Voltage=2.5V, Nominal Supply Current=3mA, Operating Supply Voltage=5V, Package Quantity=3000, Supplier Part Number 1=05R8364, Access Time=900ns, Category=EEPROM, ComponentLink1Description=https://datasheet.ciiva.com/15123/getdatasheetpartid-765483-15123763.pdf?src-supplier=Verical, ComponentLink1URL=https://datasheet.ciiva.com/15123/getdatasheetpartid-765483-15123763.pdf?src-supplier=Verical, ComponentLink2Description=https://datasheet.ciiva.com/1155/1688094-1155350.pdf?src-supplier=Element14, ComponentLink2URL=https://datasheet.ciiva.com/1155/1688094-1155350.pdf?src-supplier=Element14, ComponentLink3Description=https://datasheet.ciiva.com/16622/21189r-16622582.pdf?src-supplier=Avnet+Europe, ComponentLink3URL=https://datasheet.ciiva.com/16622/21189r-16622582.pdf?src-supplier=Avnet+Europe, ComponentLink4Description=https://datasheet.ciiva.com/3185/21189r-3185335.pdf?src-supplier=Avnet, ComponentLink4URL=https://datasheet.ciiva.com/3185/21189r-3185335.pdf?src-supplier=Avnet, ComponentLink5Description=https://datasheet.ciiva.com/4858/21189l-21989-4858953.pdf?src-supplier=Mouser, ComponentLink5URL=https://datasheet.ciiva.com/4858/21189l-21989-4858953.pdf?src-supplier=Mouser, ComponentLink6Description=https://datasheet.ciiva.com/14134/24aa64-24lc64-24fc64-eng-tds-14134845.pdf?src-supplier=Distrelec, ComponentLink6URL=https://datasheet.ciiva.com/14134/24aa64-24lc64-24fc64-eng-tds-14134845.pdf?src-supplier=Distrelec, ComponentLink7Description=https://datasheet.ciiva.com/16226/filehandler-aspxddocname-en011843-16226797.pdf?src-supplier=Future+Electronics, ComponentLink7URL=https://datasheet.ciiva.com/16226/filehandler-aspxddocname-en011843-16226797.pdf?src-supplier=Future+Electronics, Contact Plating=Tin,Matte, Density=64Kb, Height=1.3mm, Interface=I2C,Serial, Lead Free="Lead Free", Length=3.1mm, Manufacturer Part Number=24LC64T-I/OT, Max Frequency=400kHz, Memory Size=64Kb, Memory Type=EEPROM, Mount="Surface Mount", Number of Pins=5, Packaging="Tape and Reel", Pricing 1="1=0.47500, 10=0.46900, 25=0.46300, 50=0.45000, 100=0.43800 (USD)", Radiation Hardening=No, REACH SVHC="No SVHC", RoHS=Yes, Stock 1=35191, Supplier 1=Newark, Termination=SMD/SMT, Width=1.8mm
IC4: "STMICROELECTRONICS   LD1117S33TR.   LDO VOLTAGE REGULATOR, 3.3V, 0.8A, SOT-223-3", Case/Package=SOT-223, Dropout Voltage=1.1V, Input Bias Current=5mA, Manufacturer=STMicroelectronics, Max Input Voltage=15V, Max Operating Temperature=125°C, Max Output Current=1.3A, Max Output Voltage=3.3V, Max Power Dissipation=12W, Min Input Voltage=4.75V, Min Operating Temperature=0°C, Output Current=800mA, Output Voltage Accuracy=1%, Package Quantity=1, Quiescent Current=10mA, Supplier Part Number 1=497-1242-1-ND, Accuracy=1%, Category="Voltage Regulators - Linear", ComponentLink1Description=https://datasheet.ciiva.com/19478/1390240-19478097.pdf?src-supplier=Jameco, ComponentLink1URL=https://datasheet.ciiva.com/19478/1390240-19478097.pdf?src-supplier=Jameco, ComponentLink2Description=https://datasheet.ciiva.com/1511/1776449-1511573.pdf?src-supplier=Element14, ComponentLink2URL=https://datasheet.ciiva.com/1511/1776449-1511573.pdf?src-supplier=Element14, ComponentLink3Description=https://datasheet.ciiva.com/2041/cd00000544-2041941.pdf?src-supplier=Digi-Key, ComponentLink3URL=https://datasheet.ciiva.com/2041/cd00000544-2041941.pdf?src-supplier=Digi-Key, ComponentLink4Description=https://datasheet.ciiva.com/2041/cd00000544-2041942.pdf?src-supplier=Digi-Key, ComponentLink4URL=https://datasheet.ciiva.com/2041/cd00000544-2041942.pdf?src-supplier=Digi-Key, ComponentLink5Description=https://datasheet.ciiva.com/2041/cd00000544-2041943.pdf?src-supplier=Digi-Key, ComponentLink5URL=https://datasheet.ciiva.com/2041/cd00000544-2041943.pdf?src-supplier=Digi-Key, ComponentLink6Description=https://datasheet.ciiva.com/16396/cd00000544-16396459.pdf?src-supplier=Future+Electronics, ComponentLink6URL=https://datasheet.ciiva.com/16396/cd00000544-16396459.pdf?src-supplier=Future+Electronics, ComponentLink7Description=https://datasheet.ciiva.com/7992/1776449-7992621.pdf?src-supplier=Element14, ComponentLink7URL=https://datasheet.ciiva.com/7992/1776449-7992621.pdf?src-supplier=Element14, ComponentLink8Description=https://datasheet.ciiva.com/28652/1776449-28652462.pdf?src-supplier=Element14, ComponentLink8URL=https://datasheet.ciiva.com/28652/1776449-28652462.pdf?src-supplier=Element14, Contact Plating=Tin,Matte, Height=1.8mm, Lead Free="Lead Free", Length=6.5mm, Manufacturer Part Number=LD1117S33TR, Max Supply Voltage=15V, Min Output Voltage=3.3V, Min Supply Voltage=4.75V, Mount="Surface Mount", Nominal Output Voltage=3.3V, Number of Outputs=1, Number of Pins=4, Number of Regulators=1, Output Type=Fixed, Output Voltage=3.3V, Packaging="Tape and Reel", Polarity=Positive, Power Dissipation=12W, Pricing 1="1=0.46000, 10=0.39000, 25=0.36440, 100=0.29150, 250=0.27064, 500=0.22900, 1000=0.17696 (USD)", Radiation Hardening=No, REACH SVHC="No SVHC", RoHS=Yes, RoHS Compliant=Yes, Series=-, Stock 1=8464, Supplier 1=Digi-Key, Termination=SMD/SMT, Voltage=3.3V, Weight=0.01lb, Width=3.5mm
IC5 IC6: "ATMEL         AT42QT1010-TSHR             Capacitive Touch Sensor, QTouch, 1.8 V, 5.5 V, SOT-23, 6 Pins, -40 C", Case/Package=SOT-23-6, Load Capacitance=20pF, Manufacturer="Microchip / Atmel", Max Operating Temperature=85°C, Max Supply Voltage=5.5V, Min Operating Temperature=-40°C, Min Supply Voltage=1.8V, Nominal Supply Current=729uA, Package Quantity=4500, Supplier Part Number 1=1276595P, Category=Uncategorized, ComponentLink1Description=https://datasheet.ciiva.com/15098/getdatasheetpartid-364797-15098928.pdf?src-supplier=Verical, ComponentLink1URL=https://datasheet.ciiva.com/15098/getdatasheetpartid-364797-15098928.pdf?src-supplier=Verical, ComponentLink2Description=https://datasheet.ciiva.com/1165/atmel-9541-at42-qtouch-bsw-at42qt1010-datasheet-1165684.pdf?src-supplier=Element14, ComponentLink2URL=https://datasheet.ciiva.com/1165/atmel-9541-at42-qtouch-bsw-at42qt1010-datasheet-1165684.pdf?src-supplier=Element14, ComponentLink3Description=https://datasheet.ciiva.com/29124/doc8287-29124726.pdf?src-supplier=Digi-Key, ComponentLink3URL=https://datasheet.ciiva.com/29124/doc8287-29124726.pdf?src-supplier=Digi-Key, ComponentLink4Description=https://datasheet.ciiva.com/14094/at42qt1010-eng-tds-14094871.pdf?src-supplier=Distrelec, ComponentLink4URL=https://datasheet.ciiva.com/14094/at42qt1010-eng-tds-14094871.pdf?src-supplier=Distrelec, ComponentLink5Description=https://datasheet.ciiva.com/29124/doc8287-29124727.pdf?src-supplier=Digi-Key, ComponentLink5URL=https://datasheet.ciiva.com/29124/doc8287-29124727.pdf?src-supplier=Digi-Key, ComponentLink6Description=https://datasheet.ciiva.com/29124/doc8287-29124728.pdf?src-supplier=Digi-Key, ComponentLink6URL=https://datasheet.ciiva.com/29124/doc8287-29124728.pdf?src-supplier=Digi-Key, Height=1.3mm, Interface=Serial, Lead Free="Lead Free", Length=3mm, Manufacturer Part Number=AT42QT1010-TSHR, Mount="Surface Mount", Number of Channels=1, Number of Inputs=1, Number of Pins=6, Operating Supply Current=729uA, Output Type="DIGITAL OUTPUT", Packaging="Tape and Reel", Pricing 1="10=0.62900, 30=0.61000, 100=0.59100 (USD)", REACH SVHC="No SVHC", Resolution=14b, RoHS=Yes, RoHS Compliant=Yes, Sensing Method=Capacitive, Series=QTouch™, Stock 1=180, Supplier 1=RSComponents, Supply Current=729uA, Touchscreen=Capacitive, Width=1.75mm
R5: "ADVANCED PHOTONIX         NSL 19M51.            LIGHT DEPENDENT RESISTOR,550NM,TO-18", Case/Package=TO-18, Manufacturer="Advanced Photonix", Max Operating Temperature=75°C, Min Operating Temperature=-60°C, Power Rating=50mW, Resistor Type=Ceramic, Supplier Part Number 1=NSL-19M51-ND, Voltage Rating=100V, Category=Uncategorized, ComponentLink1Description=http://www.farnell.com/datasheets/77395.pdf?src-supplier=Farnell, ComponentLink1URL=http://www.farnell.com/datasheets/77395.pdf?src-supplier=Farnell, ComponentLink2Description=http://www.farnell.com/datasheets/77395.pdf?src-supplier=Element14, ComponentLink2URL=http://www.farnell.com/datasheets/77395.pdf?src-supplier=Element14, Lead Diameter=0.4mm, Lead Length=36mm, Manufacturer Part Number="NSL 19M51.", Number of Pins=2, Pricing 1="1=1.07000, 5=1.02000, 10=0.88800, 25=0.78000, 50=0.64800, 100=0.55200, 500=0.48000, 1000=0.42000, 5000=0.37200 (USD)", REACH SVHC=Unknown, RoHS=Yes, Stock 1=17728, Supplier 1=Digi-Key, Voltage Rating (DC)=100V
R9 R11: library part "RES 10K"
USB: Manufacturer="Amphenol ICC / FCI", Supplier Part Number 1=609-5379-1-ND, Manufacturer Part Number=10118192-0002LF, Pricing 1="1=0.46000, 10=0.44000, 25=0.37680, 50=0.32040, 100=0.30780, 250=0.27640, 500=0.26386 (USD)", RoHS=No, Stock 1=42230, Supplier 1=Digi-Key

## Via types
v1: diameter 1.27, hole 0.711, Top Layer to Bottom Layer, 33 vias

## Nets (pads, with @x,y where several pads share a name; then routed paths per layer and width w, separated by ;. In a path a pad name is that pad's centre, name@x,y a point inside that pad or via, vN(x,y) a via of type N, cw(c..) or ccw(c..) an arc to the next point about the centre after c; other vN are vias at no path point)
GND: C2.2 C3.1 C4.2 C5.2 C6.2 C7.2 C8.1 C9.2 C10.2 C11.1 C12.2 C14.2 D1.1 ESP.15 H1.1 H2.1 H3.1 IC2.2 IC3.2 IC4.1 IC5.2 IC6.2 R6.2 S1.4 S2.4 S3.3 S3.6 S4.3 S4.6 S5.3 S5.6 S6.3 USB.5 USB.S1 USB.S2 USB.S3 USB.S4 USB.S5 USB.S6 | length 401.7
  Top Layer w0.254: C7.2 78.188,72.114 79.126,73.052 C6.2 C8.1 78.603,78.501 78.603,78.984 78.36,79.227 C9.2@78.36,80.208 ; C9.2 78.36,80.828 78.853,81.321 IC4.1 78.853,85.051 77.978,85.926 77.978,97.79 78.879,98.691 78.879,98.791 79.402,99.314 C2.2 ; IC2.2 82.304,112.26 83.566,110.998 C3.1 83.82,109.22 89.259,109.22 89.408,109.369 ; IC3.2 89.408,109.369 ; C5.2 93.626,111.892 93.103,111.369 93.103,111.137 91.335,109.369 89.408,109.369
  Top Layer w0.4: v1(76.454,79.756) 76.506,79.808 77.96,79.808 78.36,80.208 C9.2 ; C2.2 82.682,99.314 C12.2 82.862,99.192 83.312,98.742 83.312,96.52 84.074,95.758 85.852,95.758 86.172,96.078 IC5.2 ; v1(83.566,77.724) 88.646,77.724 89.662,78.74 C4.2 89.662,80.618 90.424,81.38 C10.2 90.424,83.622 89.916,84.13 C11.1 ; C5.2 95.401,111.892 96.031,112.522 v1(96.266,112.522) ; D1.1 D1.1@96.261,118.388 ; v1(98.298,116.586) 98.064,116.586 D1.1@96.261,118.388 ; H1.1 111.249,103.885 H3.1 ; IC6.2 112.202,116.266 ; v1(112.268,114.046) 112.202,114.112 112.202,116.266 ; R6.2 113.073,52.832 114.554,52.832 115.316,53.594 115.316,56.388 113.03,58.674 H2.1 ; ESP.15 118.11,92.944 v1(118.11,95.504) 118.345,95.504 118.925,94.924 S1.4 128.016,96.774 131.318,100.076 169.164,100.076 ; v1(118.11,113.03) 118.11,115.57 123.032,120.492 123.032,121.76 123.632,122.36 USB.S2 ; USB.5 USB.S2 ; USB.S1 131.502,124.958 USB.S3 USB.S4 USB.S5 USB.S6 123.892,122.37 USB.S2 ; S6.3 S5.6 S5.3 173.206,75.416 173.206,75.748 S4.6 S4.3 169.164,100.076 ; S3.3@169.164,123.444 S3.6 169.164,100.076 ; D1.1@96.261,118.388 99.338,118.388 100.838,119.888 105.156,119.888 106.294,118.75 C14.2 108.05,118.75 108.5,118.3 108.5,117.306 109.982,115.824 111.76,115.824 112.202,116.266
  Top Layer w0.5: C2.2@79.402,99.314 79.148,99.568 77.47,99.568 76.708,100.33 76.708,103.378 77.216,103.886 78.994,103.886 83.166,108.058 83.166,109.074 C3.1 ; S2.4 112.776,52.655 112.996,52.875 R6.2
  Bottom Layer w0.4: v1(76.454,79.756) 78.486,77.724 v1(83.566,77.724) ; v1(96.266,112.522) 96.266,112.776 98.298,114.808 v1(98.298,116.586) ; H1.1 112.268,104.903 v1(112.268,114.046) 117.094,114.046 v1(118.11,113.03) ; H2.1 113.03,73.987 117.094,78.051 117.094,87.376 115.062,89.408 115.062,94.234 116.332,95.504 v1(118.11,95.504) 119.634,97.028 H3.1
NetC13_1: C13.1 IC5.4 | length 2.8
  Top Layer w0.5: IC5.4 87.149,101.373 89.889,101.373 C13.1
NetC13_2: C13.2 IC5.3 R9.2 | length 6.1
  Top Layer w0.5: IC5.3 87.122,99.401 87.167,99.446 C13.2 R9.2
NetC15_1: C15.1 IC6.4 | length 3.8
  Top Layer w0.5: IC6.4 113.152,120.563 113.197,120.518 C15.1
NetC15_2: C15.2 IC6.3 R11.2 | length 7.7
  Top Layer w0.5: R11.2 113.792,117.334 113.152,117.974 IC6.3 113.152,118.573 113.197,118.618 C15.2
NetC16_1: C16.1 ESP.1 S2.1 | length 54.6
  Top Layer w0.5: ESP.1 104.01,67.434 101.346,64.77 101.346,39.116 105.664,34.798 S2.1 108.276,30.592 109.348,29.52 C16.1
NetC16_2: C16.2 S2.3 | length 5.8
  Top Layer w0.4: C16.2 112.268,33.993 112.776,34.501 S2.3
NetD2_A: D2.A F1.1 | length 4.1
  Top Layer w0.5: D2.A 135.251,111.265 136.398,112.412 F1.1
NetESP_2: ESP.2 R5.1 R6.1 | length 35
  Top Layer w0.4: R5.1 106.01,64.1 ESP.2 ; v1(111.252,64.77) 111.252,58.674 113.03,56.896 R6.1 R6.1@112.694,55.544
  Bottom Layer w0.4: R5.1 105.664,61.214 107.696,61.214 v1(111.252,64.77)
NetESP_3: ESP.3 R4.2 | length 23
  Top Layer w0.4: ESP.3 108.01,68.266 109.728,66.548 109.728,56.15 109.458,55.88 R4.2
NetESP_4: ESP.4 H2.2 | length 19.2
  Top Layer w0.5: ESP.4 110.01,70.838 115.57,65.278 H2.2
NetESP_5: ESP.5 H2.4 | length 20.5
  Top Layer w0.5: ESP.5 112.01,74.68 120.65,66.04 H2.4
NetESP_6: ESP.6 IC5.1 | length 43.9
  Top Layer w0.5: v1(84.836,97.282) 84.836,97.49 85.177,97.831 85.177,99.015 IC5.1 ; ESP.6 114.028,77.862 114.028,80.754 v1(114.046,80.772)
  Bottom Layer w0.5: v1(84.836,97.282) 87.376,94.742 104.902,94.742 107.95,91.694 107.95,87.63 114.22,81.36 114.193,81.334 114.193,80.919 v1(114.046,80.772)
NetESP_7: ESP.7 IC6.1 | length 44.2
  Top Layer w0.4: v1(110.236,117.348) 110.402,117.514 110.792,117.514 111.252,117.974 IC6.1 ; v1(115.824,81.788) 115.824,78.03 ESP.7
  Bottom Layer w0.4: v1(110.236,117.348) 110.236,117.125 109.474,116.363 109.474,88.138 v1(115.824,81.788)
NetESP_11: ESP.11 IC2.3 R7.2 | length 101.2
  Top Layer w0.4: v1(124.46,84.582) 124.341,84.463 119.629,84.463 ESP.11 122.158,84.344 124.206,82.296 124.256,82.296 125.823,80.729 R7.2
  Top Layer w0.5: IC2.3 83.069,113.188 84.497,111.76 85.344,111.76 85.344,111.572 85.941,110.975 v1(85.941,110.766) ; v1(107.437,98.898) 112.36,98.898 v1(115.824,102.362)
  Bottom Layer w0.5: v1(85.941,110.766) 86.088,110.619 86.088,109.492 86.614,108.966 86.614,107.95 91.948,102.616 91.948,97.536 93.265,96.219 93.679,96.219 93.726,96.266 97.79,96.266 100.422,98.898 v1(107.437,98.898) ; v1(115.824,102.362) 119.38,105.918 128.27,105.918 131.064,103.124 131.064,88.138 127.508,84.582 v1(124.46,84.582)
NetESP_12: ESP.12 R8.1 S1.2 | length 12.8
  Top Layer w0.4: ESP.12 123.606,86.344 124.384,87.122 R8.1 128.524,89.619 128.016,90.127 S1.2
NetESP_16: ESP.16 H2.3 | length 32.8
  Top Layer w0.254: ESP.16 116.332,92.522 v1(116.332,89.916)
  Bottom Layer w0.254: v1(116.332,89.916) 118.11,88.138 H2.3
NetESP_17: ESP.17 H3.3 IC3.3 R2.2 | length 70.1
  Top Layer w0.5: IC3.3 90.358,111.849 90.403,111.895 91.575,111.895 v1(91.694,112.014) ; ESP.17 114.01,94.706 118.618,99.314 123.698,99.314 124.714,100.33 H3.3 124.714,106.426 126.746,108.458 R2.2 124.457,110.279 124.16,109.982 v1(123.952,109.982)
  Bottom Layer w0.5: v1(91.694,112.014) 100.076,120.396 113.538,120.396 v1(123.952,109.982)
NetESP_18: ESP.18 H3.2 IC3.1 R3.1 | length 63.5
  Top Layer w0.5: v1(87.63,110.236) 87.63,110.947 88.103,111.42 88.413,111.42 88.458,111.465 IC3.1 ; v1(88.562,107.612) 90.528,107.612 90.699,107.442 92.456,107.442 93.472,108.458 118.489,108.458 121.072,111.041 R3.1 121.412,109.982 122.174,109.22 H3.2 119.634,101.346 117.348,101.346 112.01,96.008 ESP.18
  Bottom Layer w0.5: v1(87.63,110.236) 87.63,110.142 88.562,109.21 v1(88.562,107.612)
NetESP_21: ESP.21 H1.4 | length 11.7
  Top Layer w0.5: H1.4 103.124,100.584 106.01,97.698 ESP.21
NetESP_22: ESP.22 H1.5 | length 12
  Top Layer w0.5: H1.5 100.584,100.838 104.01,97.412 ESP.22
NetF1_2: F1.2 USB.1 | length 17
  Top Layer w0.4: USB.1 129.47,116.91 129.54,116.84 129.54,115.57 130.556,114.554 133.604,114.554 134.62,115.57 134.62,117.856 135.101,118.337 F1.2
NetH4_1: H4.1 R9.1 | length 27
  Top Layer w0.4: R9.1 93.98,96.52 v1(94.996,97.536)
  Bottom Layer w0.4: v1(94.996,97.536) 96.012,98.552 96.012,110.353 102.801,117.142 103.176,117.517 103.176,118.416 H4.1@103.378,118.618
NetH4_2: H4.2 R11.1 | length 16
  Top Layer w0.4: H4.2@103.379,116.078 106.935,112.522 114.851,112.522 116.797,114.468 R11.1
NetIC2_4: IC2.4 R1.1 | length 4.4
  Top Layer w0.254: IC2.4 83.057,115.582 83.13,115.655 84.413,115.655 85.344,116.586 85.344,117.645 R1.1
NetR1_2: R1.2 S3.2 | length 90
  Top Layer w0.5: R1.2 89.916,120.904 v1@92.456,123.444 ; v1(134.366,123.444) 136.652,125.73 171.45,125.73 171.704,125.476 S3.2 S3.2@171.704,123.444
  Bottom Layer w0.5: v1(92.71,123.444) v1(134.366,123.444)
NetR10_1: R10.1 S2.2 | length 4.7
  Top Layer w0.4: R10.1 108.276,45.945 S2.2
NetS3_5: S3.5 S4.2 | length 8.2
  Top Layer w0.4: S4.2 S3.5
NetS4_5: S4.5 S5.2 | length 10.2
  Top Layer w0.4: S5.2 171.704,72.818 173.86,74.974 173.86,76.104 171.704,78.26 S4.5
NetS5_5: S5.5 S6.2 | length 7.7
  Top Layer w0.4: S6.2 S5.5
V+: C1.1 C4.1 C10.1 C11.2 D1.3 D2.C H3.4 IC2.6 IC4.3 R2.1 R3.2 S3.1 S3.4 S4.1 S4.4 S5.1 S5.4 S6.1 | length 247.6
  Top Layer w0.254: v1(76.708,86.106) 75.184,87.63 75.184,103.766 78.104,106.686 78.104,111.586 81.534,115.016 IC2.6 C1.1 83.312,117.856 85.217,119.761 D1.3 ; v1(83.566,87.376) 83.566,84.589 IC4.3 83.453,83.901 83.826,83.528 85.321,83.528 85.537,83.312 C10.1 ; C11.2@87.504,86.234 C11.2@87.884,86.614 ; C4.1 87.762,83.054 C10.1 ; C11.2 88.016,84.134 87.504,83.622 C10.1 ; H3.4 134.886,103.886 D2.C
  Top Layer w0.4: D1.3 92.956,119.761 102.283,110.434 117.535,110.434 120.727,113.626 120.727,113.776 120.997,114.046 R3.2 125.644,114.046 126.406,113.284 R2.1 127.086,113.284 128.524,111.846 128.524,105.156 H3.4 ; D2.C 154.389,104.128 155.418,105.156 v1(157.734,105.156) ; S6.1 S5.4 S5.1 174.244,73.897 174.514,74.167 174.514,76.643 174.244,76.914 S4.4 S4.1 S3.4 S3.1@174.244,123.444
  Bottom Layer w0.254: v1(76.708,86.106) 82.296,86.106 v1(83.566,87.376)
  Bottom Layer w0.4: v1(157.734,105.156) 161.036,108.458 172.466,108.458 174.244,106.68 S3.4
VCC: C3.2 C5.1 C6.1 C7.1 C8.2 C9.1 ESP.8 H2.5 IC2.1 IC2.5 IC3.4 IC4.2 R4.1 R5.2 R7.1 R8.2 R10.2 | length 175.9
  Top Layer w0.254: v1(79.248,87.884) 81.153,85.979 IC4.2 81.153,80.645 C9.1 81.026,80.264 C8.2 C6.1 81.026,73.052 83.058,71.02 C7.1 83.312,68.072 v1(86.36,68.072) ; v1(79.502,109.474) C3.2 81.666,113.003 81.547,113.122 IC2.1 81.534,113.435 81.534,114.046 81.876,114.388 ; IC2.5 82.219,115.221 82.219,114.731 81.876,114.388 ; C5.1 92.456,113.792 91.44,114.808 90.678,114.808 90.62,114.75 90.203,114.75 89.129,115.824 86.36,115.824 84.924,114.388 81.876,114.388 ; v1(105.156,49.022) R10.2 108.619,49.022 108.962,49.365 108.962,49.51 108.966,49.514 108.966,52.621 R4.1
  Top Layer w0.5: R5.2 106.934,54.102 107.866,53.17 108.925,53.17 R4.1 ; H2.5 123.19,67.564 118.01,72.744 ESP.8 118.13,77.724 R7.1 126.578,77.724 126.873,78.019 126.873,78.359 131.529,83.015 R8.2
  Bottom Layer w0.254: v1(79.248,87.884) 79.375,88.011 79.375,109.347 v1(79.502,109.474) ; v1(105.156,49.022) 118.11,49.022 123.19,54.102 H2.5
  Bottom Layer w0.5: v1(86.36,68.072) 88.177,66.255 103.163,66.255 R5.2
VCCIO: C2.1 C12.1 C14.1 D1.2 IC5.5 IC5.6 IC6.5 IC6.6 | length 51
  Top Layer w0.5: C2.1 79.563,101.153 82.743,101.153 C12.1 82.904,101.092 C12.1@83.058,101.246 ; v1(84.836,107.696) 84.836,103.024 C12.1@83.058,101.246 ; IC5.5 IC5.6 85.222,101.291 85.177,101.246 C12.1@83.058,101.246 ; v1(92.964,121.412) 92.976,121.4 96.05,121.4 D1.2 107.112,121.388 107.85,120.65 C14.1 111.207,120.65 111.252,120.695 IC6.6 IC6.5
  Bottom Layer w0.5: v1(84.836,107.696) 84.836,110.49 84.582,110.744 84.582,113.03 v1(92.964,121.412)
pads on no net: C1.2 ESP.9 ESP.10 ESP.13 ESP.14 ESP.19 ESP.20 H1.2 H1.3 H1.6 IC3.5 IC4.4 S1.1 S1.3 S6.4 S6.5 S6.6 USB.2 USB.3 USB.4
copper on no net: | length 378.2
  Top Layer w0.254: 72.136,133.604 72.136,134.112 ; 72.136,135.636 72.136,136.144 ; 72.391,21.082 72.389,21.59 ; 73.66,133.35 72.136,133.858 ; 73.66,134.366 72.136,133.858 ; 73.66,135.382 72.136,135.89 ; 73.66,136.398 72.136,135.89 ; 73.913,21.848 72.39,21.336 ; 73.915,20.832 72.39,21.336 ; 91.036,133.858 72.136,133.858 ; 97.64,135.89 72.136,135.89 ; 104.036,133.858 122.936,133.858 ; 113.688,135.89 139.192,135.89 ; 117.325,21.444 72.39,21.336 ; 120.142,131.572 122.682,131.572 ; 121.158,131.064 122.682,131.572 ; 121.158,132.08 122.682,131.572 ; 121.412,133.35 122.936,133.858 ; 121.412,134.366 122.936,133.858 ; 122.682,131.318 122.682,131.826 ; 122.936,133.604 122.936,134.112 ; 132.865,21.482 177.8,21.59 ; 133.096,131.318 133.096,131.826 ; 133.096,133.35 133.096,133.858 ; 134.62,131.064 133.096,131.572 ; 134.62,132.08 133.096,131.572 ; 134.62,133.096 133.096,133.604 ; 134.62,134.112 133.096,133.604 ; 135.636,131.572 133.096,131.572 ; 137.668,135.382 139.192,135.89 ; 137.668,136.398 139.192,135.89 ; 138.938,130.048 138.938,130.556 ; 139.192,135.636 139.192,136.144 ; 140.462,129.794 138.938,130.302 ; 140.462,130.81 138.938,130.302 ; 147.424,133.604 133.096,133.604 ; 151.615,130.302 138.938,130.302 ; 163.472,133.604 177.8,133.604 ; 164.361,130.302 177.038,130.302 ; 175.514,129.794 177.038,130.302 ; 175.514,130.81 177.038,130.302 ; 176.275,22.094 177.8,21.59 ; 176.276,133.096 177.8,133.604 ; 176.276,134.112 177.8,133.604 ; 176.277,21.078 177.8,21.59 ; 177.038,130.048 177.038,130.556 ; 177.801,21.336 177.799,21.844 ; 177.8,133.35 177.8,133.858 ; 181.614,24.385 182.118,22.86 ; 181.86,127.001 182.372,128.524 ; 181.864,22.861 182.372,22.859 ; 182.118,128.525 182.626,128.523 ; 182.224,67.033 182.118,22.86 ; 182.266,84.351 182.372,128.524 ; 182.63,24.383 182.118,22.86 ; 182.876,126.999 182.372,128.524

## Other copper
Top Layer:
  text "67.056 (mm)" at 97.894,134.976 h1.52
  text "50.8 (mm)" at 91.29,132.944 h1.52
  text "44.704 (mm)" at 147.678,132.69 h1.52
  text "38.1 (mm)" at 151.869,129.388 h1.52
  text "10.414 (mm)" at 120.373,127.915 h1.52
  text "105.664 (mm)" at 183.139,67.285 h1.52 r89.86
  text "105.41 (mm)" at 117.581,20.531 h1.52 r0.14

## Silkscreen, mask and mechanical layers (free items; w line width, h text height)
Top Overlay:
  text "Asad's RGB Clock" at 76.962,27.178 h5 r90
Mechanical 15:
  the board outline again, w1